# Altium PCB {TEX137}_F2837x_controlCARD_R1.3_PCB_PADS.PcbDoc (part 4 of 6)
Units mm, origin at the board's own origin, x right, y up, seen from the top; angles counter-clockwise.
Board outline 105.77 x 51.09 mm, 10 copper layers (Primary Side, Inner Layer 2, Inner Layer 3, Inner Layer 4, Inner Layer 5, Inner Layer 6, Inner Layer 7, Inner Layer 8, Inner Layer 9, Secondary Side), stack 1.634 mm thick; 292 components, 317 nets, 1400 pads, 1032 vias.
Unrouted connection lines stored in the file: 106.
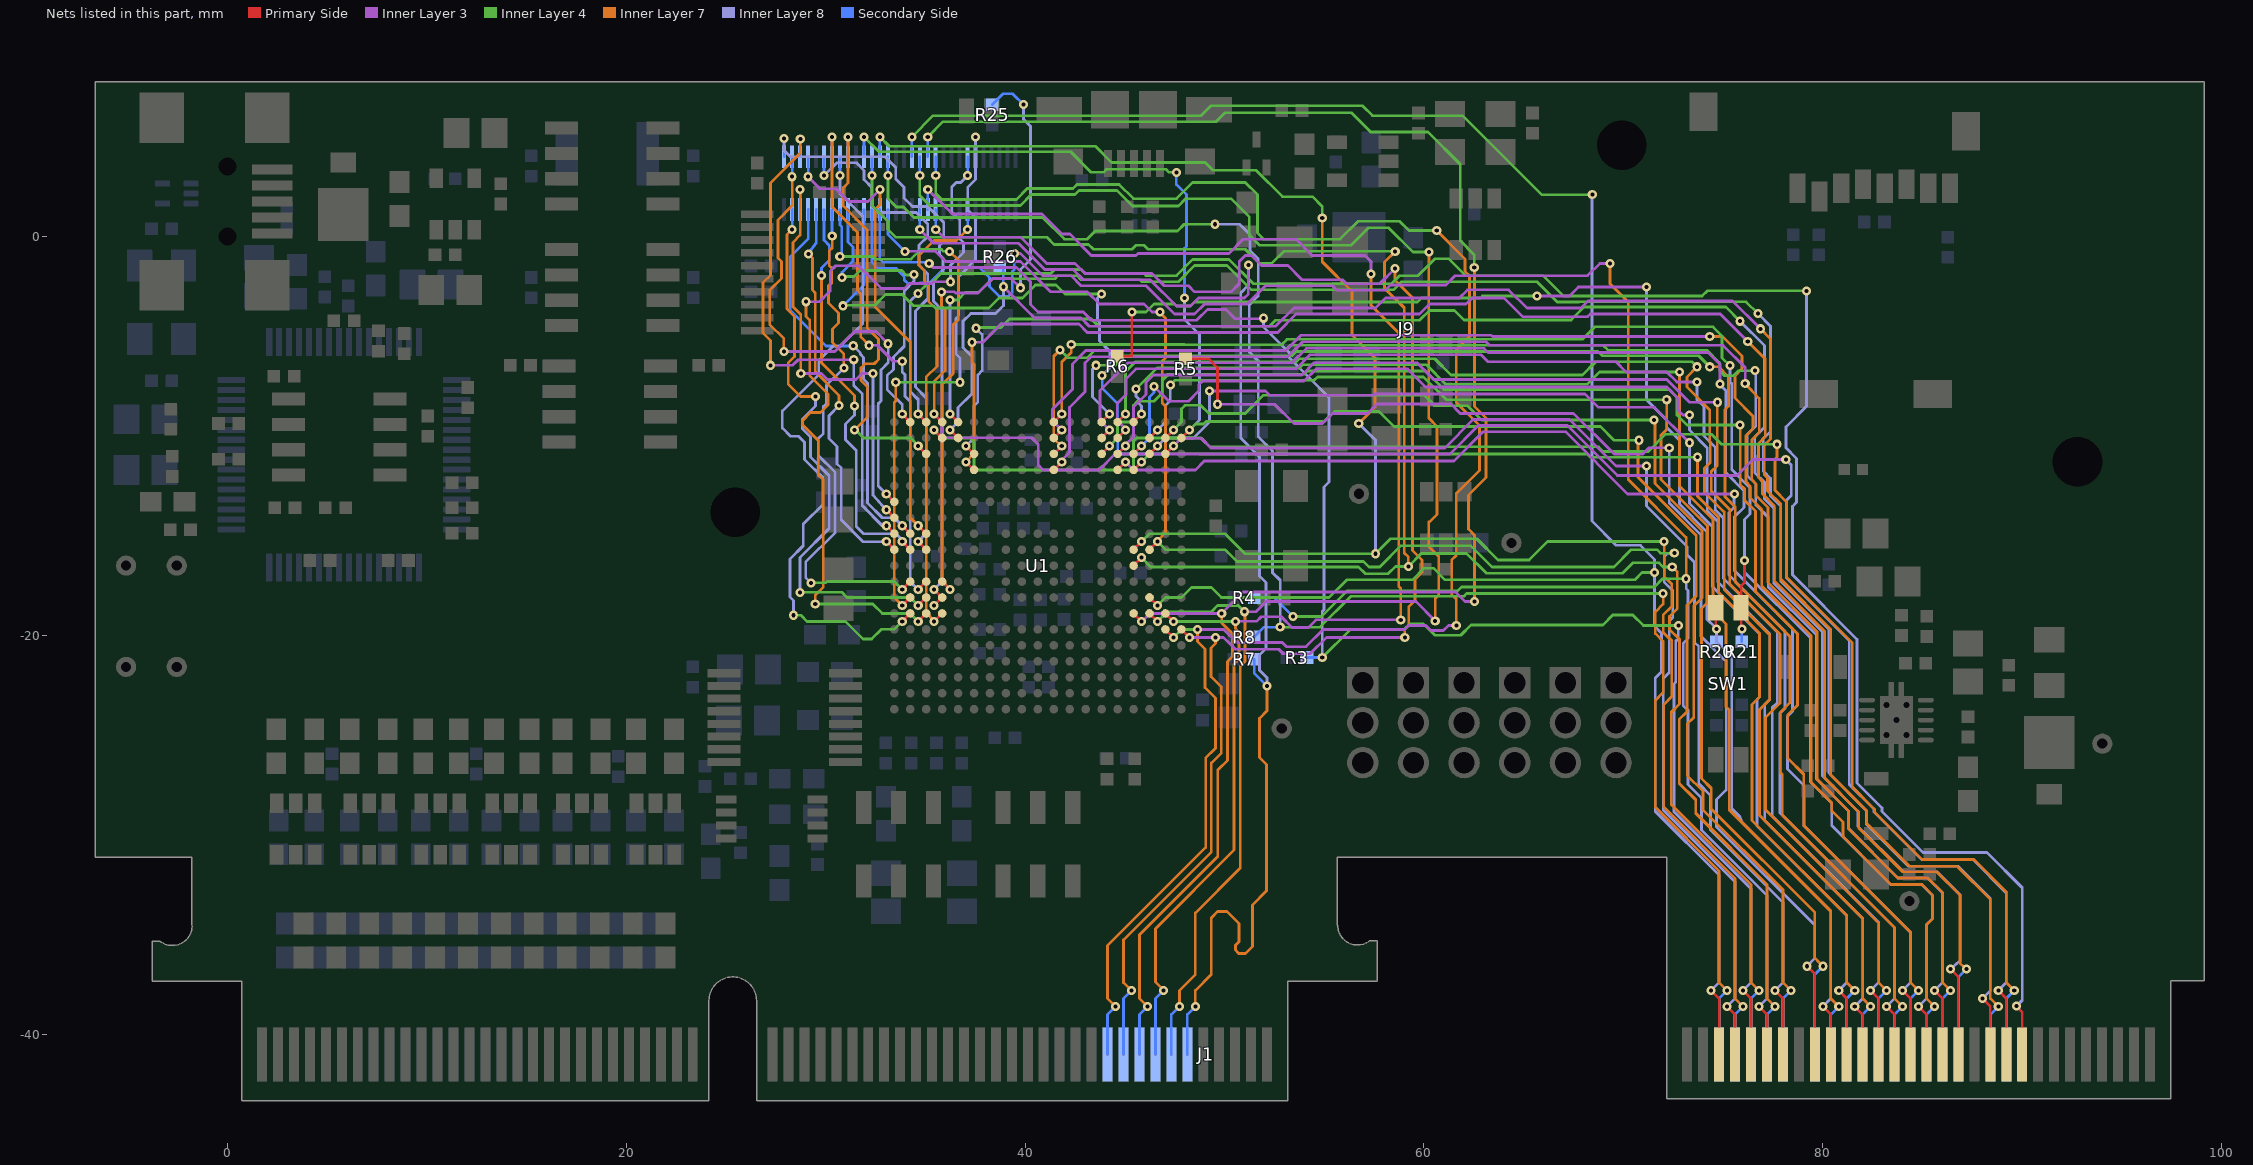
[diagram p12: the nets of this part, all layers, seen from the top]

## Via types
v1: diameter 0.457, hole 0.203, Primary Side to Secondary Side, 1025 vias
v2: diameter 0.711, hole 0.254, Primary Side to Secondary Side, 7 vias

## Nets (pads, with @x,y where several pads share a name; then routed paths per layer and width w, separated by ;. In a path a pad name is that pad's centre, name@x,y a point inside that pad or via, vN(x,y) a via of type N, cw(c..) or ccw(c..) an arc to the next point about the centre after c; other vN are vias at no path point) (continued)
MCU_GPIO-54_L: J1.100 J9.40 U1.P18 | length 93
  Primary Side w0.135: U1.P18@47.04,-19.71 v1(47.44,-20.11)
  Inner Layer 3 w0.14: v1(48.642,-19.711) 49.642,-19.71 49.962,-19.71 50.623,-20.371 52.896,-20.371 53.099,-20.575 54.09,-20.575 54.954,-19.71 59.017,-19.71 59.218,-19.51 60.109,-19.51 60.363,-19.764 60.972,-19.764 61.226,-19.51 v1(61.624,-19.51)
  Inner Layer 4 w0.14: v1(35.521,3.052) 35.521,2.152 35.821,1.852 39.561,1.852 40.109,2.399 42.406,2.399 42.609,2.603 44.718,2.603 45.429,1.891 47.588,1.891 48.401,2.704 51.042,2.704 51.652,2.095 51.652,0.164 51.957,-0.141 55.791,-0.141 56.693,0.761 58.776,0.761 59.246,0.291 v1(60.643,0.291) ; v1(47.44,-20.11) 47.84,-19.71 v1(48.642,-19.711)
  Inner Layer 7 w0.14: v1(44.537,-38.623) 44.137,-38.223 44.137,-35.569 49.055,-30.651 49.055,-26.155 49.543,-25.667 49.543,-23.15 49.023,-22.63 49.023,-20.689 48.642,-20.307 v1(48.642,-19.711) ; v1(60.643,0.291) 62.065,-1.131 62.065,-1.753 62.281,-1.968 62.281,-5.008 61.624,-5.665 61.624,-8.327 62.787,-9.49 62.787,-11.736 61.624,-12.899 61.624,-16.002 61.392,-16.234 61.392,-17.954 61.624,-18.186 v1(61.624,-19.51)
  Secondary Side w0.135: v1@35.52,3.052 J9.40@35.52,3.992 ; J1.100@44.137,-41.024 44.137,-39.023 ; 44.137,-39.023 v1(44.537,-38.623)
MCU_GPIO-55_L: J1.102 J9.39 U1.P19 | length 82.7
  Primary Side w0.135: U1.P19@47.84,-19.71 v1(48.24,-20.11)
  Inner Layer 3 w0.14: v1(35.521,0.352) 35.912,-0.039 39.765,-0.039 41.085,-1.36 42.508,-1.36 43.016,-1.868 46.369,-1.868 46.978,-2.477 48.197,-2.477 48.502,-2.782 50.331,-2.782 50.737,-2.376 50.737,-1.258 51.042,-0.953 51.347,-0.953 51.855,-1.461 53.176,-1.461 53.887,-2.173 55.919,-2.173 56.122,-2.376 57.785,-2.376 v1(58.547,-1.614) ; v1(48.24,-20.11) 49.541,-20.11 49.956,-20.111 50.547,-20.702 52.718,-20.702 52.947,-20.93 54.293,-20.93 55.112,-20.118 v1(59.042,-20.118)
  Inner Layer 7 w0.14: v1(45.337,-37.823) 44.937,-37.423 44.937,-35.277 49.34,-30.874 49.34,-26.403 49.841,-25.903 49.841,-22.593 49.326,-22.078 49.326,-20.637 49.547,-20.416 49.547,-20.116 v1(49.542,-20.111) ; v1(58.547,-1.614) 58.547,-2.2 59.423,-3.076 59.423,-15.749 59.905,-16.231 59.905,-16.842 59.551,-17.197 59.551,-18.261 59.243,-18.568 59.243,-19.484 59.042,-19.686 v1(59.042,-20.118)
  Secondary Side w0.135: v1@35.52,0.352 J9.39@35.52,1.352 ; J1.102@44.937,-41.024 44.937,-38.223 ; 44.937,-38.223 v1(45.337,-37.823)
MCU_GPIO-56_L: J1.104 J9.38 U1.N16 | length 94.9
  Primary Side w0.135: U1.N16@45.44,-18.91 v1(45.84,-19.31)
  Inner Layer 3 w0.14: v1(45.84,-19.31) 46.291,-18.91 v1(49.86,-18.91) 50.173,-18.589 50.93,-17.832 61.585,-17.832 62.064,-18.311 v1(62.544,-18.311)
  Inner Layer 4 w0.14: v1(35.12,4.992) 35.881,5.752 49.588,5.752 50.032,6.197 56.375,6.197 57.335,5.238 60.204,5.238 61.823,3.619 61.823,-0.217 62.523,-0.929 v1(62.523,-1.563)
  Inner Layer 7 w0.14: v1(46.137,-38.623) 45.737,-38.223 45.737,-35.022 49.664,-31.095 49.664,-26.765 50.153,-26.276 50.153,-21.323 50.407,-21.069 50.407,-19.926 49.86,-19.379 v1(49.86,-18.91) ; v1(62.523,-1.563) 62.544,-1.584 62.544,-8.53 63.118,-9.104 63.118,-12.097 62.239,-12.975 62.239,-14.682 62.544,-14.987 v1(62.544,-18.311)
  Secondary Side w0.135: J9.38@35.12,3.992 v1(35.12,4.992) ; J1.104@45.737,-41.024 45.737,-39.023 ; 45.737,-39.023 v1(46.137,-38.623)
MCU_GPIO-57_L: J1.106 J9.37 U1.N18 | length 80.3
  Primary Side w0.135: U1.N18@47.04,-18.91 v1(47.44,-19.31)
  Inner Layer 3 w0.14: v1(35.121,2.352) 36.356,1.117 40.844,1.117 41.847,0.113 42.254,0.113 43.321,-0.953 45.556,-0.953 45.657,-0.852 50.229,-0.852 50.941,-0.141 53.582,-0.141 54.395,-0.953 57.037,-0.953 57.34,-1.257 v1(57.34,-1.88) ; v1(50.546,-19.304) 51.614,-19.304 51.842,-19.076 52.845,-19.076 53.378,-19.609 54.205,-19.609 54.585,-19.228 v1(58.839,-19.228)
  Inner Layer 4 w0.14: v1(47.44,-19.31) 50.54,-19.31 v1(50.546,-19.304)
  Inner Layer 7 w0.14: v1(46.938,-37.823) 46.938,-37.785 46.537,-37.385 46.537,-34.718 50.483,-30.772 50.483,-21.45 50.723,-21.21 50.723,-19.849 50.546,-19.672 v1(50.546,-19.304) ; v1(57.34,-1.88) 57.34,-3.451 58.737,-4.848 58.737,-17.549 58.839,-17.654 v1(58.839,-19.228)
  Secondary Side w0.135: J9.37@35.12,1.352 v1(35.121,2.352) ; J1.106@46.537,-41.024 46.537,-38.223 ; 46.537,-38.223 v1(46.938,-37.823)
MCU_GPIO-58_L: J1.108 J9.36 U1.N17 | length 89.3
  Primary Side w0.135: U1.N17@46.24,-18.91 v1(46.64,-19.31)
  Inner Layer 3 w0.14: v1(51.003,-18.821) 51.588,-18.821 52.095,-18.314 59.601,-18.314 v1(60.566,-19.279)
  Inner Layer 4 w0.14: v1(34.721,3.052) 34.721,2.052 35.221,1.552 39.765,1.552 40.307,2.095 42.508,2.095 42.711,2.298 44.616,2.298 45.39,1.523 47.689,1.523 48.057,1.891 50.331,1.891 51.245,0.977 51.245,0.063 51.753,-0.445 56.343,-0.445 57.22,0.431 58.229,0.431 59.447,-0.787 v1(60.249,-0.787) ; v1(46.64,-19.31) 47.129,-18.821 49.34,-18.821 49.652,-18.51 50.691,-18.51 v1(51.003,-18.821)
  Inner Layer 7 w0.14: v1(47.738,-38.623) 47.738,-37.823 48.538,-37.023 48.538,-33.924 50.788,-31.673 50.788,-21.563 51.029,-21.323 51.029,-18.847 v1(51.003,-18.821) ; v1(60.249,-0.787) 60.249,-1.194 60.242,-1.201 60.242,-9.115 60.654,-9.527 60.654,-13.941 60.273,-14.322 60.242,-14.322 60.242,-15.545 60.742,-16.045 60.742,-17.987 60.566,-18.163 v1(60.566,-19.279)
  Secondary Side w0.135: v1@34.72,3.052 J9.36@34.72,3.992 ; J1.108@47.337,-41.024 47.337,-39.023 ; 47.338,-39.023 v1(47.738,-38.623)
MCU_GPIO-59_L: J1.110 J9.35 R7.1 | length 69.7
  Inner Layer 3 w0.14: v1(34.721,0.352) 35.418,-0.345 39.664,-0.345 40.984,-1.665 42.406,-1.665 42.914,-2.173 46.267,-2.173 47.588,-3.493 48.299,-3.493 48.705,-3.087 50.991,-3.087 51.194,-2.884 51.194,-1.449 v1(51.207,-1.436)
  Inner Layer 7 w0.14: v1(48.538,-38.623) 48.538,-37.823 49.338,-37.023 49.338,-34.178 49.655,-33.861 50.132,-33.861 50.728,-34.458 50.728,-35.372 50.551,-35.55 50.551,-35.791 50.716,-35.956 51.055,-35.956 51.398,-35.613 51.398,-33.527 52.109,-32.816 52.109,-26.479 51.753,-26.123 51.753,-24.168 52.133,-23.789 v1(52.133,-22.543)
  Inner Layer 8 w0.14: v1(51.207,-1.436) 51.207,-2.44 50.812,-2.834 50.812,-10.12 51.753,-11.061 51.753,-17.031 52.082,-17.36 52.082,-20.664 51.753,-20.993 51.753,-21.755 52.133,-22.135 v1(52.133,-22.543)
  Secondary Side w0.135: v1@34.72,0.352 J9.35@34.72,1.352 ; J1.110@48.137,-41.024 48.137,-39.023 ; 48.138,-39.023 v1(48.538,-38.623) ; R7.1@51.487,-21.209 51.487,-21.897 v1(52.133,-22.543)
MCU_GPIO-60_L: J1.125 J9.34 U1.M17 | length 111.8
  Primary Side w0.135: U1.M17@46.24,-18.11 v1(46.64,-18.51) ; v1(74.403,-37.823) 74.803,-38.223 J1.125@74.803,-41.024
  Inner Layer 4 w0.14: v1(34.32,4.992) 35.381,6.052 48.832,6.052 49.332,6.553 56.917,6.553 57.417,6.052 61.943,6.052 65.904,2.091 v1(68.444,2.091) ; v1(46.64,-18.51) 47.039,-18.111 47.842,-18.111 48.342,-17.611 49.342,-17.611 49.842,-18.111 55.245,-18.111 56.132,-17.224 59.424,-17.224 60.01,-16.638 60.478,-16.638 61.064,-17.224 70.571,-17.224 70.942,-16.852 v1(71.565,-16.852)
  Inner Layer 8 w0.14: v1(68.444,2.091) 68.428,2.075 68.428,-14.275 69.647,-15.494 70.854,-15.494 71.565,-16.205 v1(71.565,-16.852) 71.565,-19.545 71.921,-19.9 71.921,-21.83 71.603,-22.148 71.603,-28.83 74.803,-32.031 74.803,-37.423 v1(74.403,-37.823)
  Secondary Side w0.135: J9.34@34.32,3.992 v1(34.32,4.992)
MCU_GPIO-61_L: J1.126 J9.28 R8.1 | length 89
  Inner Layer 4 w0.14: v1(33.121,3.052) 33.121,1.892 33.54,1.473 33.9,1.473 34.421,0.952 40.882,0.952 41.974,-0.14 43.116,-0.14 43.522,0.266 47.636,0.266 47.98,0.609 v1(49.517,0.609) ; v1(52.794,-19.597) 54.789,-19.597 56.337,-18.049 62.001,-18.049 62.141,-17.91 v1(71.998,-17.91)
  Inner Layer 7 w0.14: v1(71.998,-17.91) 71.998,-18.443 71.604,-18.837 71.604,-19.913 71.998,-20.307 71.998,-22.872 71.601,-23.268 71.601,-28.622 74.803,-31.824 74.803,-37.423 v1(75.203,-37.823)
  Inner Layer 8 w0.14: v1(49.517,0.609) 50.751,0.609 51.279,0.08 51.279,-0.709 51.689,-1.118 51.689,-2.985 51.245,-3.429 51.245,-5.793 51.689,-6.237 51.689,-10.032 52.414,-10.757 52.414,-16.866 52.794,-17.247 52.794,-19.305 v1(52.794,-19.597)
  Secondary Side w0.135: v1@33.12,3.052 J9.28@33.12,3.992 ; R8.1@51.487,-20.092 51.981,-19.597 v1(52.794,-19.597) ; J1.126@74.803,-41.024 74.803,-38.223 v1(75.203,-37.823)
MCU_GPIO-62_L: J1.127 J9.27 U1.J17 | length 84.5
  Primary Side w0.14: U1.J17@46.24,-15.71 v1(46.641,-15.31) ; v1(75.203,-38.623) 75.603,-39.023 J1.127@75.603,-41.024
  Inner Layer 3 w0.14: v1(33.973,-0.75) 35.516,-0.75 36.024,-1.258 39.765,-1.258 41.289,-2.782 43.117,-2.782 43.727,-3.392 45.962,-3.392 46.369,-3.798 v1(46.775,-3.798)
  Inner Layer 4 w0.14: v1(46.641,-15.31) 47.04,-15.709 50.028,-15.709 50.618,-16.299 56.964,-16.299 57.241,-16.576 57.787,-16.576 58.854,-15.509 62.345,-15.509 63.411,-16.576 69.53,-16.576 70.397,-15.709 71.692,-15.709 71.87,-15.887 v1(72.556,-15.887)
  Inner Layer 7 w0.14: v1(46.641,-15.31) 47.04,-14.834 47.04,-8.523 46.877,-8.36 46.877,-6.26 47.04,-6.097 47.04,-4.103 46.775,-3.838 v1(46.775,-3.798)
  Inner Layer 8 w0.14: v1(72.556,-15.887) 72.226,-15.887 72.048,-16.065 72.048,-17.335 72.48,-17.767 72.48,-19.113 72.302,-19.291 72.302,-21.865 72.003,-22.164 72.003,-28.773 75.603,-32.374 75.603,-38.223 v1(75.203,-38.623)
  Secondary Side w0.14: J9.27@33.12,1.352 33.12,0.103 v1(33.973,-0.75)
MCU_GPIO-63_L: J1.128 J9.26 U1.J16 | length 100.5
  Primary Side w0.135: U1.J16@45.44,-15.71 v1(45.84,-15.31)
  Inner Layer 4 w0.14: v1(32.72,4.992) 33.191,4.52 43.524,4.52 44.337,3.708 49.034,3.708 49.428,3.314 51.588,3.314 52.91,1.991 54.408,1.991 54.902,1.498 v1(54.902,0.914) ; v1(45.84,-15.31) 46.24,-14.91 50.021,-14.91 51.026,-15.916 v1(57.569,-15.916) 58.32,-15.164 62.649,-15.164 63.716,-16.231 65.277,-16.231 66.205,-15.303 v1(72.048,-15.303)
  Inner Layer 7 w0.14: v1(54.902,0.914) 54.902,-1.271 56.388,-2.757 56.388,-4.941 57.545,-6.098 57.545,-8.573 v1(56.732,-9.386) ; v1(72.048,-15.303) 72.048,-17.056 72.429,-17.437 72.429,-18.557 71.998,-18.988 71.998,-19.85 72.429,-20.281 72.429,-23.075 72.032,-23.472 72.032,-28.622 75.603,-32.193 75.603,-38.223 v1(76.003,-38.623)
  Inner Layer 8 w0.14: v1(56.732,-9.386) 57.545,-10.199 57.569,-10.199 v1(57.569,-15.916)
  Secondary Side w0.135: J9.26@32.72,3.992 v1(32.72,4.992) ; J1.128@75.603,-41.024 75.603,-39.023 v1(76.003,-38.623)
MCU_GPIO-64_L: J1.129 J9.25 R3.2 | length 86.3
  Primary Side w0.135: v1(76.003,-37.823) 76.403,-38.223 J1.129@76.403,-41.024
  Inner Layer 3 w0.14: v1(35.193,-1.36) 35.396,-1.563 39.561,-1.563 40.273,-2.274 40.273,-3.417 40.654,-3.798 42.914,-3.798 43.321,-4.205 48.604,-4.205 49.144,-3.665 50.071,-3.665 50.534,-4.128 51.957,-4.128 v1(51.957,-4.103)
  Inner Layer 4 w0.14: v1(54.903,-21.121) 56.313,-19.711 59.016,-19.711 59.296,-19.432 59.982,-19.432 60.553,-20.003 61.848,-20.003 62.37,-19.482 68.974,-19.482 69.469,-18.986 70.471,-18.986 71.004,-19.519 v1(72.759,-19.519)
  Inner Layer 8 w0.14: v1(51.957,-4.103) 51.957,-4.544 53.242,-5.83 53.242,-6.074 55.243,-8.074 55.243,-12.319 54.993,-12.569 54.993,-18.721 54.903,-18.811 v1(54.903,-21.121) ; v1(72.759,-19.519) 72.759,-20.17 72.628,-20.302 72.628,-22.353 72.54,-22.441 72.54,-28.853 76.403,-32.716 76.403,-37.423 v1(76.003,-37.823)
  Secondary Side w0.135: J9.25@32.72,1.352 32.72,-1.13 32.884,-1.293 35.126,-1.293 v1(35.193,-1.36) ; R3.2@54.141,-21.121 v1(54.903,-21.121)
MCU_GPIO-65_L: J1.130 J9.24 U1.K16 | length 102.8
  Primary Side w0.135: U1.K16@45.44,-16.51 v1(45.84,-16.11)
  Inner Layer 4 w0.14: v1(32.321,3.052) 32.321,1.552 33.12,0.752 33.12,0.352 33.511,-0.039 41.085,-0.039 41.453,-0.407 43.181,-0.407 43.422,-0.648 45.353,-0.648 45.556,-0.445 45.962,-0.445 46.165,-0.648 51.042,-0.648 51.754,-1.36 52.363,-1.36 52.972,-0.75 v1(58.56,-0.75) ; v1(45.84,-16.11) 46.303,-16.573 56.723,-16.573 57.067,-16.916 58.204,-16.916 58.571,-16.549 v1@59.22,-16.549 ; v1(59.22,-16.562) v1@59.22,-16.549 ; v1(72.454,-16.573) 71.997,-16.573 71.794,-16.37 70.473,-16.37 69.952,-16.891 63.132,-16.891 62.142,-15.901 59.867,-15.901 v1@59.22,-16.549
  Inner Layer 7 w0.14: v1(58.56,-0.75) 58.027,-1.284 58.027,-2.604 59.016,-3.582 59.016,-15.876 59.22,-16.079 v1(59.22,-16.562) ; v1(72.454,-16.573) 72.708,-16.827 72.708,-18.656 72.312,-19.053 72.312,-19.706 72.81,-20.205 72.81,-23.456 72.401,-23.865 72.401,-28.497 76.403,-32.499 76.403,-37.423 v1(76.804,-37.823)
  Secondary Side w0.135: v1@32.32,3.052 J9.24@32.32,3.992 ; J1.130@76.403,-41.024 76.403,-38.223 v1(76.804,-37.823)
MCU_GPIO-66_L: J1.131 J9.23 R4.2 | length 112.2
  Primary Side w0.135: v1(76.803,-38.623) 77.203,-39.023 J1.131@77.203,-41.024
  Inner Layer 3 w0.14: v1(39.46,-0.852) 39.765,-0.852 40.882,-1.969 42.305,-1.969 42.813,-2.477 46.064,-2.477 47.486,-3.9 48.502,-3.9 49.01,-3.392 51.144,-3.392 52.058,-2.477 55.411,-2.477 55.64,-2.707 58.05,-2.707 58.324,-2.433 61.106,-2.433 61.57,-1.969 68.213,-1.969 68.822,-1.36 v1(69.33,-1.36)
  Inner Layer 4 w0.14: v1(53.43,-19.064) 54.865,-19.064 56.147,-17.782 61.69,-17.782 61.887,-17.584 71.557,-17.584 71.972,-17.17 v1(73.152,-17.17)
  Inner Layer 7 w0.14: v1(69.33,-1.36) 69.33,-2.376 70.245,-3.29 70.245,-12.194 73.152,-15.101 v1(73.152,-17.17)
  Inner Layer 8 w0.14: v1(73.152,-17.17) 73.152,-17.665 73.242,-17.755 73.242,-20.17 73.001,-20.411 73.001,-23.523 73.242,-23.764 73.242,-27.485 73.916,-28.159 73.916,-29.771 77.204,-33.059 77.204,-38.223 v1(76.803,-38.623)
  Secondary Side w0.135: J9.23@32.32,1.352 32.32,-1.308 32.62,-1.608 33.54,-1.608 33.94,-2.008 33.94,-2.185 34.118,-2.363 34.722,-2.363 34.747,-2.337 35.204,-2.337 35.992,-1.55 37.705,-1.55 38.213,-2.058 38.213,-2.515 38.709,-3.011 39.155,-3.011 39.358,-2.808 39.358,-1.752 39.46,-1.65 v1(39.46,-0.852) ; R4.2@51.487,-18.111 52.477,-18.111 v1(53.43,-19.064)
MCU_GPIO-67_L: J1.132 J9.22 U1.B19 | length 89.9
  Primary Side w0.135: U1.B19@47.84,-10.11 v1(48.24,-9.71)
  Inner Layer 4 w0.14: v1(31.92,4.992) 32.671,4.241 42.292,4.241 43.321,3.212 43.93,3.212 44.083,3.365 47.066,3.365 47.219,3.212 v1(47.588,3.212) ; v1(48.24,-9.71) 48.541,-9.409 48.941,-9.409 49.066,-9.285 55.005,-9.285 55.513,-8.777 57.748,-8.777 58.499,-9.528 68.846,-9.528 69.54,-10.223 v1(70.778,-10.223)
  Inner Layer 7 w0.14: v1(70.778,-10.223) 70.74,-10.223 70.74,-12.079 73.659,-14.999 73.659,-18.035 73.191,-18.503 73.191,-23.837 72.801,-24.227 72.801,-27.422 73.631,-28.251 73.631,-28.926 77.204,-32.499 77.204,-38.223 v1(77.604,-38.623)
  Inner Layer 8 w0.14: v1(47.994,-3.087) 47.994,-4.169 48.741,-4.916 48.741,-9.209 v1(48.24,-9.71)
  Secondary Side w0.135: J9.22@31.92,3.992 v1(31.92,4.992) ; v1(47.588,3.212) 47.588,2.603 48.096,2.095 48.096,-0.499 47.994,-0.601 v1(47.994,-3.087) ; J1.132@77.204,-41.024 77.204,-39.023 v1(77.604,-38.623)
MCU_GPIO-68_L: J1.133 J9.21 U1.C18 | length 90
  Primary Side w0.135: U1.C18@47.04,-10.91 v1(47.44,-10.51) ; v1(77.603,-37.823) 78.003,-38.223 J1.133@78.003,-41.024
  Inner Layer 3 w0.14: v1(47.44,-10.51) 47.828,-10.122 48.832,-10.122 49.315,-10.605 61.048,-10.605 62.47,-9.183 67.298,-9.183 69.635,-11.52 v1(71.159,-11.52)
  Inner Layer 4 w0.14: v1(30.873,-3.481) 30.899,-3.455 32.46,-3.455 33.007,-2.909 33.839,-2.909 34.411,-3.481 35.396,-3.481 35.51,-3.595 38.189,-3.595 38.697,-3.087 39.866,-3.087 40.514,-2.439 41.555,-2.439 42,-2.884 v1(43.829,-2.884)
  Inner Layer 8 w0.14: v1(43.829,-2.884) 43.625,-3.087 43.625,-4.205 43.727,-4.306 43.727,-5.241 44.246,-5.76 44.246,-6.591 v1(43.865,-6.972) ; v1(71.159,-11.52) 71.159,-13.525 73.191,-15.557 73.191,-15.963 73.572,-16.344 73.572,-20.359 73.787,-20.574 73.787,-27.446 74.373,-28.032 74.373,-29.771 78.004,-33.402 78.004,-37.423 v1(77.603,-37.823)
  Secondary Side w0.135: v1(30.873,-3.481) 31.92,-2.434 J9.21@31.92,1.352 ; v1(43.865,-6.972) 43.865,-7.607 44.64,-8.382 44.64,-10.795 44.754,-10.909 47.041,-10.909 v1(47.44,-10.51)
MCU_GPIO-69_L: J1.134 U1.B18 | length 62.1
  Primary Side w0.135: U1.B18@47.04,-10.11 v1(47.44,-9.71)
  Inner Layer 4 w0.14: v1(47.44,-9.71) 47.841,-9.309 47.841,-8.649 48.018,-8.472 48.807,-8.472 49.213,-8.878 51.042,-8.878 51.957,-7.964 60.008,-7.964 60.541,-8.496 62.18,-8.496 62.89,-9.207 v1(71.54,-9.207)
  Inner Layer 7 w0.14: v1(71.54,-9.207) 71.591,-9.207 71.591,-12.397 73.939,-14.745 73.939,-18.136 73.533,-18.542 73.533,-24.13 73.201,-24.462 73.201,-27.028 73.995,-27.822 73.995,-28.756 78.004,-32.765 78.004,-37.423 v1(78.404,-37.823)
  Secondary Side w0.135: J1.134@78.004,-41.024 78.004,-38.223 v1(78.404,-37.823)
MCU_GPIO-70_L: J1.137 R5.2 | length 62.4
  Primary Side w0.135: R5.2@48.045,-6.135 49.188,-6.135 49.645,-6.592 v1(49.645,-8.42) ; v1(79.204,-36.601) 79.603,-37.001 J1.137@79.603,-41.024
  Inner Layer 3 w0.14: v1(49.645,-8.42) 52.514,-8.42 53.481,-9.386 54.903,-9.386 55.411,-8.878 57.175,-8.878 57.646,-8.407 61.353,-8.407 61.824,-8.878 67.501,-8.878 69.548,-10.925 70.956,-10.925 71.277,-10.604 v1(72.302,-10.604)
  Inner Layer 8 w0.14: v1(72.302,-10.604) 72.302,-13.375 73.901,-14.974 73.901,-20.053 75.158,-21.31 75.158,-27.767 74.678,-28.247 74.678,-29.619 79.604,-34.545 79.604,-36.182 v1(79.204,-36.601)
MCU_GPIO-71_L: J1.138 U1.B17 | length 65.3
  Primary Side w0.135: U1.B17@46.24,-10.11 v1(46.64,-9.71)
  Inner Layer 4 w0.14: v1(47.283,-7.456) 47.523,-7.216 54.497,-7.216 54.663,-7.049 59.984,-7.049 61.126,-8.191 v1(72.175,-8.191)
  Inner Layer 7 w0.14: v1(72.175,-8.191) 72.175,-9.69 71.896,-9.969 71.896,-12.194 74.218,-14.516 74.218,-18.365 73.914,-18.669 73.914,-27.178 74.41,-27.674 74.41,-28.714 79.604,-33.908 79.604,-36.182 v1(80.004,-36.601)
  Inner Layer 8 w0.14: v1(46.64,-9.71) 47.04,-9.31 47.04,-8.472 47.283,-8.229 v1(47.283,-7.456)
  Secondary Side w0.135: J1.138@79.604,-41.024 79.604,-37.001 v1(80.004,-36.601)
MCU_GPIO-72_L: J1.139 R6.2 R20.2 SW1.2 | length 73.7
  Primary Side w0.135: R6.2@44.616,-6.008 45.353,-6.008 v1(45.353,-3.798) ; SW1.2@74.637,-18.63 74.637,-19.646 v1(74.676,-19.685) ; v1(80.004,-38.623) 80.403,-39.022 J1.139@80.403,-41.024
  Inner Layer 3 w0.14: v1(65.673,-2.985) 67.297,-2.985 67.743,-2.54 v1(71.159,-2.54)
  Inner Layer 4 w0.14: v1(45.353,-3.798) 46.064,-3.798 46.47,-3.392 47.486,-3.392 47.588,-3.493 48.299,-3.493 48.502,-3.29 59.678,-3.29 59.881,-3.087 62.828,-3.087 62.929,-2.985 v1(65.673,-2.985)
  Inner Layer 8 w0.14: v1(71.159,-2.54) 71.159,-8.191 72.175,-9.207 72.175,-9.588 72.81,-10.223 72.81,-13.426 74.18,-14.796 74.18,-19.177 74.65,-19.647 v1(74.676,-19.685) 74.676,-20.32 75.438,-21.082 75.438,-28.702 75.838,-29.083 75.927,-29.356 80.404,-33.833 80.404,-38.223 v1(80.004,-38.623)
  Secondary Side w0.135: R20.2@74.676,-20.32 v1(74.676,-19.685)
MCU_GPIO-73_L: J1.140 U1.A16 | length 68.1
  Primary Side w0.135: U1.A16@45.44,-9.31 v1(45.84,-8.91)
  Inner Layer 4 w0.14: v1(45.556,-7.659) 46.608,-6.607 53.753,-6.607 53.919,-6.44 60.137,-6.44 61.116,-7.419 68.175,-7.419 68.801,-6.794 v1(72.81,-6.794)
  Inner Layer 7 w0.14: v1(72.81,-6.794) 72.81,-12.519 74.498,-14.207 74.498,-18.784 75.145,-19.431 75.145,-23.583 75.313,-23.751 75.313,-28.755 80.404,-33.845 80.404,-38.223 v1(80.804,-38.623)
  Inner Layer 8 w0.14: v1(45.556,-7.659) 45.556,-8.016 45.707,-8.167 45.707,-8.383 45.84,-8.516 v1(45.84,-8.91)
  Secondary Side w0.135: J1.140@80.404,-41.024 80.404,-39.023 v1(80.804,-38.623)
MCU_GPIO-74_L: J1.141 U1.C17 | length 64.8
  Primary Side w0.135: U1.C17@46.24,-10.91 v1(46.64,-10.51) ; v1(80.804,-37.823) 81.203,-38.222 J1.141@81.203,-41.024
  Inner Layer 3 w0.14: v1(49.242,-7.761) 52.058,-7.761 52.261,-7.964 57.479,-7.964 57.545,-7.898 68.072,-7.898 68.746,-8.572 71.54,-8.572 v1(73.318,-10.35)
  Inner Layer 8 w0.14: v1(46.64,-10.51) 47.041,-10.109 48.44,-10.109 49.242,-9.307 v1(49.242,-7.761) ; v1(73.318,-10.35) 73.318,-13.398 74.459,-14.539 74.459,-17.552 76.835,-19.928 76.835,-23.102 76.708,-23.229 76.708,-29.565 81.204,-34.061 81.204,-37.423 v1(80.804,-37.823)
MCU_GPIO-75_L: J1.142 U1.D16 | length 62.4
  Primary Side w0.135: U1.D16@45.44,-11.71 v1(45.84,-11.31)
  Inner Layer 4 w0.127: 46.249,-10.909 48.756,-10.909
  Inner Layer 4 w0.14: v1(45.84,-11.31) 46.241,-10.909 46.249,-10.909 ; 48.756,-10.909 68.187,-10.909 68.352,-11.074 v1(73.724,-11.074)
  Inner Layer 7 w0.14: v1(73.724,-11.074) 73.724,-13.03 74.777,-14.082 74.777,-17.844 76.835,-19.902 76.835,-23.102 76.454,-23.483 76.454,-29.298 81.204,-34.048 81.204,-37.423 v1(81.604,-37.823)
  Secondary Side w0.135: J1.142@81.204,-41.024 81.204,-38.223 v1(81.604,-37.823)
MCU_GPIO-76_L: J1.143 U1.C16 | length 69.3
  Primary Side w0.135: U1.C16@45.44,-10.91 v1(45.84,-10.51) ; v1(81.604,-38.623) 82.003,-39.022 J1.143@82.003,-41.024
  Inner Layer 3 w0.14: v1(46.469,-7.519) 47.218,-8.269 48.197,-8.269 48.705,-7.761 48.705,-7.456 48.909,-7.253 53.989,-7.253 54.598,-6.643 59.172,-6.643 60.085,-7.556 72.175,-7.556 72.747,-8.128 72.747,-8.699 73.001,-8.953 v1(73.318,-8.953)
  Inner Layer 8 w0.14: v1(73.318,-8.953) 73.318,-9.715 74.207,-10.604 74.207,-13.779 74.739,-14.311 74.739,-17.336 77.343,-19.94 77.343,-23.229 77.089,-23.483 77.089,-29.299 82.004,-34.214 82.004,-38.223 v1(81.604,-38.623)
  Secondary Side w0.135: v1(45.84,-10.51) 46.241,-10.109 46.241,-8.053 46.469,-7.824 v1(46.469,-7.519)
MCU_GPIO-77_L: J1.144 U1.A15 | length 71.7
  Primary Side w0.135: U1.A15@44.64,-9.31 v1(45.04,-8.91)
  Inner Layer 4 w0.14: v1(45.04,-8.91) 45.04,-6.789 45.543,-6.286 53.582,-6.286 53.733,-6.135 60.542,-6.135 61.353,-6.946 67.957,-6.946 68.618,-6.286 73.445,-6.286 v1(73.699,-6.54)
  Inner Layer 7 w0.14: v1(73.699,-6.54) 73.191,-7.048 73.191,-7.556 74.334,-8.699 74.334,-10.299 74.359,-10.325 74.359,-11.331 74.068,-11.622 74.068,-12.835 75.056,-13.823 75.056,-17.703 77.343,-19.99 77.343,-23.229 76.835,-23.737 76.835,-29.031 82.004,-34.201 82.004,-38.223 v1(82.404,-38.623)
  Secondary Side w0.135: J1.144@82.004,-41.024 82.004,-39.023 v1(82.404,-38.623)
MCU_GPIO-78_L: J1.145 U1.B15 | length 71.2
  Primary Side w0.135: U1.B15@44.64,-10.11 v1(45.04,-9.71) ; v1(82.404,-37.823) 82.803,-38.222 J1.145@82.803,-41.024
  Inner Layer 3 w0.14: v1(45.04,-9.71) 45.04,-9.647 44.627,-9.234 44.627,-8.37 45.059,-7.938 45.059,-7.151 45.567,-6.643 53.582,-6.643 54.29,-5.935 62.857,-5.935 63.207,-6.286 69.635,-6.286 70.143,-6.794 72.175,-6.794 72.683,-7.302 v1(73.699,-7.302)
  Inner Layer 8 w0.14: v1(73.699,-7.302) 73.699,-8.191 74.042,-8.534 74.042,-10.007 74.613,-10.579 74.613,-13.728 75.018,-14.133 75.018,-17.158 77.724,-19.864 77.724,-23.382 77.47,-23.636 77.47,-29.057 82.804,-34.392 82.804,-37.423 v1(82.404,-37.823)
MCU_GPIO-79_L: J1.146 U1.C15 | length 71.3
  Primary Side w0.135: U1.C15@44.64,-10.91 v1(45.04,-10.51)
  Inner Layer 3 w0.14: v1(45.04,-10.51) 45.04,-10.452 45.44,-10.052 45.44,-8.56 46.064,-7.936 46.064,-7.327 46.443,-6.948 53.887,-6.948 54.497,-6.338 59.654,-6.338 60.491,-7.175 72.175,-7.175 73.318,-8.318 v1(74.715,-8.318)
  Inner Layer 7 w0.14: v1(74.715,-8.318) 74.715,-11.483 74.41,-11.788 74.41,-12.773 75.336,-13.699 75.336,-17.438 77.851,-19.953 77.851,-23.407 77.128,-24.13 77.128,-28.753 82.804,-34.429 82.804,-37.423 v1(83.204,-37.823)
  Secondary Side w0.135: J1.146@82.804,-41.024 82.804,-38.223 v1(83.204,-37.823)
MCU_GPIO-80_L: J1.147 U1.D15 | length 65.6
  Primary Side w0.135: U1.D15@44.64,-11.71 v1(45.04,-11.31) ; v1(83.204,-38.623) 83.604,-39.023 83.604,-41.022 J1.147@83.603,-41.024
  Inner Layer 3 w0.14: v1(45.04,-11.31) 45.44,-11.71 48.54,-11.71 48.984,-11.266 61.505,-11.266 62.978,-9.793 67.095,-9.793 70.218,-12.915 v1(75.566,-12.915)
  Inner Layer 8 w0.14: v1(75.566,-12.915) 75.553,-12.915 75.553,-13.589 75.298,-13.845 75.298,-16.98 78.105,-19.788 78.105,-23.661 77.851,-23.915 77.851,-28.904 83.604,-34.657 83.604,-38.223 v1(83.204,-38.623)
MCU_GPIO-81_L: J1.148 U1.A14 | length 74.3
  Primary Side w0.135: U1.A14@43.84,-9.31 v1(44.24,-8.91)
  Inner Layer 4 w0.14: v1(43.561,-6.465) 44.518,-6.465 44.996,-5.987 53.379,-5.987 53.599,-5.767 68.728,-5.767 68.948,-5.987 73.781,-5.987 v1(74.334,-6.54)
  Inner Layer 7 w0.14: v1(74.334,-6.54) 74.774,-6.54 75.28,-7.046 75.28,-8.515 75.096,-8.699 75.096,-13.055 75.615,-13.574 75.615,-17.335 78.359,-20.079 78.359,-23.383 77.866,-23.876 77.866,-26.887 77.972,-26.993 77.972,-29.025 78.728,-29.782 83.604,-34.658 83.604,-38.223 v1(84.004,-38.623)
  Inner Layer 8 w0.14: v1(43.561,-6.465) 43.376,-6.65 43.376,-8.046 v1(44.24,-8.91)
  Secondary Side w0.135: J1.148@83.604,-41.024 83.604,-39.023 v1(84.004,-38.623)
MCU_GPIO-82_L: J1.149 U1.B14 | length 74.6
  Primary Side w0.135: U1.B14@43.84,-10.11 v1(44.24,-9.71) ; v1(84.004,-37.823) 84.403,-38.222 J1.149@84.403,-41.024
  Inner Layer 3 w0.14: v1(44.24,-9.71) 43.756,-9.226 43.756,-7.732 45.149,-6.338 53.379,-6.338 54.103,-5.614 63.018,-5.614 63.228,-5.824 74.252,-5.824 74.843,-6.413 v1(74.843,-7.394)
  Inner Layer 8 w0.14: v1(74.843,-7.394) 74.817,-7.42 74.817,-7.404 75.135,-7.722 75.135,-11.85 76.049,-12.765 76.049,-13.589 75.577,-14.061 75.577,-16.765 78.486,-19.674 78.486,-23.813 78.232,-24.067 78.232,-26.703 79.061,-27.532 79.061,-29.555 84.404,-34.898 84.404,-37.423 v1(84.004,-37.823)
MCU_GPIO-83_L: J1.150 U1.C14 | length 72.4
  Primary Side w0.135: U1.C14@43.84,-10.91 v1(44.24,-10.51)
  Inner Layer 4 w0.14: v1(44.24,-10.51) 44.641,-10.109 44.641,-9.409 44.741,-9.309 45.241,-9.309 45.441,-9.109 45.441,-8.472 45.644,-8.269 46.47,-8.269 46.877,-7.862 46.877,-7.216 47.181,-6.911 53.989,-6.911 54.155,-6.745 60.061,-6.745 60.999,-7.683 72.302,-7.683 72.683,-8.064 72.683,-8.953 73.191,-9.461 v1(75.858,-9.461)
  Inner Layer 7 w0.14: v1(75.858,-9.461) 75.858,-12.45 76.087,-12.68 76.087,-13.239 76.627,-13.778 76.627,-17.816 78.74,-19.929 78.74,-23.51 78.241,-24.009 78.241,-26.162 79.049,-26.97 79.049,-29.543 84.404,-34.898 84.404,-37.423 v1(84.805,-37.823)
  Secondary Side w0.135: J1.150@84.404,-41.024 84.404,-38.223 v1(84.805,-37.823)
MCU_GPIO-84: J1.151 R21.2 SW1.1 U1.A11 | length 83.6
  Primary Side w0.135: U1.A11@41.44,-9.31 v1(41.84,-8.91) ; v1(75.946,-19.685) 75.907,-19.646 SW1.1@75.907,-18.63 75.907,-17.526 76.073,-17.36 v1(76.073,-16.256) ; v1(84.805,-38.623) 85.205,-39.023 85.205,-41.022 J1.151@85.203,-41.024
  Inner Layer 4 w0.14: v1(42.316,-5.424) 43.825,-5.424 43.829,-5.427 47.984,-5.427 52.871,-5.43 53.137,-5.164 67.939,-5.164 68.566,-4.537 74.495,-4.537 74.952,-4.994 74.952,-6.099 v1(75.35,-6.48)
  Inner Layer 7 w0.14: v1(41.84,-8.91) 41.84,-6.295 42.316,-5.819 v1(42.316,-5.424)
  Inner Layer 8 w0.14: v1(75.35,-6.48) 75.35,-7.302 75.44,-7.392 75.44,-11.696 76.354,-12.61 76.354,-13.922 76.073,-14.203 v1(76.073,-16.256) 76.073,-16.841 79.381,-20.15 79.381,-27.354 80.455,-28.428 80.455,-29.552 83.402,-32.499 84.962,-32.499 85.486,-33.023 85.486,-34.223 85.205,-34.504 85.205,-38.223 v1(84.805,-38.623)
  Secondary Side w0.135: R21.2@75.946,-20.32 v1(75.946,-19.685)
MCU_GPIO-85_L: J1.152 U1.B11 | length 80
  Primary Side w0.135: U1.B11@41.44,-10.11 v1(41.84,-9.71)
  Inner Layer 3 w0.14: v1(41.84,-9.71) 41.361,-9.231 41.361,-8.681 42.377,-7.665 42.377,-6.395 43.043,-5.729 53.074,-5.729 53.849,-4.954 63.374,-4.954 63.436,-5.016 v1(74.334,-5.016)
  Inner Layer 7 w0.14: v1(74.334,-5.016) 74.969,-5.016 75.953,-6 75.953,-6.63 75.596,-6.986 75.596,-8.108 76.506,-9.018 76.506,-9.637 76.147,-9.996 76.147,-12.305 76.357,-12.515 76.357,-13.104 76.943,-13.69 76.943,-17.546 79.427,-20.031 79.427,-27.399 80.455,-28.428 80.455,-28.816 81.014,-29.375 81.014,-30.086 83.427,-32.499 84.976,-32.499 85.5,-33.023 85.5,-34.223 85.205,-34.518 85.205,-38.223 v1(85.605,-38.623)
  Secondary Side w0.135: J1.152@85.205,-41.024 85.205,-39.023 v1(85.605,-38.623)
MCU_GPIO-86_L: J1.153 U1.C11 | length 81.7
  Primary Side w0.135: U1.C11@41.44,-10.91 v1(41.84,-10.51) ; v1(85.605,-37.823) 86.003,-38.222 J1.153@86.003,-41.024
  Inner Layer 4 w0.14: v1(41.758,-5.703) 42.143,-6.088 43.121,-6.088 43.502,-5.707 53.074,-5.707 53.32,-5.462 68.982,-5.462 69.227,-5.707 74.185,-5.707 74.83,-6.353 74.83,-6.734 75.084,-6.988 75.528,-6.988 75.782,-6.734 v1(76.611,-6.734)
  Inner Layer 7 w0.14: v1(41.758,-5.703) 41.724,-5.73 41.44,-6.014 41.44,-10.187 v1(41.84,-10.51)
  Inner Layer 8 w0.14: v1(76.611,-6.734) 76.645,-6.767 76.645,-9.498 76.213,-9.93 76.213,-12.012 76.233,-12.012 76.645,-12.423 76.645,-13.464 77.268,-14.088 77.268,-17.579 79.686,-19.997 79.686,-27.201 81.294,-28.809 81.294,-29.681 83.781,-32.169 85.254,-32.169 86.003,-32.917 86.003,-37.425 v1(85.605,-37.823)
MCU_GPIO-87_L: J1.154 U1.D11 | length 80.1
  Primary Side w0.135: U1.D11@41.44,-11.71 v1(41.84,-11.31)
  Inner Layer 3 w0.14: v1(41.84,-11.31) 41.851,-11.221 42.232,-10.84 42.232,-8.572 43.012,-7.792 43.012,-6.342 43.321,-6.033 53.176,-6.033 53.925,-5.284 63.12,-5.284 63.299,-5.464 74.998,-5.464 76.112,-6.578 v1(76.112,-7.369)
  Inner Layer 7 w0.14: v1(76.112,-7.369) 76.811,-8.131 76.811,-9.84 76.439,-10.212 76.439,-12.192 76.659,-12.412 76.659,-13.002 77.248,-13.591 77.248,-17.361 79.722,-19.835 79.722,-27.237 81.294,-28.809 81.294,-29.705 83.757,-32.169 85.268,-32.169 86.005,-32.905 86.005,-37.423 v1(86.405,-37.823)
  Secondary Side w0.135: J1.154@86.005,-41.024 86.005,-38.223 v1(86.405,-37.823)
MCU_GPIO-88: J1.155 U1.C6 | length 89.8
  Primary Side w0.135: v1(37.04,-10.51) U1.C6@37.44,-10.91 ; v1(86.403,-36.741) 86.803,-37.141 J1.155@86.803,-41.024
  Inner Layer 4 w0.14: v1(37.54,-4.608) 37.582,-4.567 38.793,-4.567 39.223,-4.137 43.321,-4.137 43.693,-4.509 52.261,-4.509 52.566,-4.205 59.78,-4.205 60.273,-3.711 61.536,-3.711 62.015,-4.191 67.384,-4.191 68.032,-3.543 75.147,-3.543 v1(75.858,-4.254)
  Inner Layer 8 w0.14: v1(37.04,-10.51) 37.44,-10.122 37.44,-8.497 37.63,-8.307 37.63,-6.948 37.847,-6.732 37.847,-4.915 v1(37.54,-4.608) ; v1(75.858,-4.254) 77.077,-5.473 77.077,-9.574 76.593,-10.058 76.607,-11.857 77.077,-12.327 77.077,-13.16 77.553,-13.635 77.553,-17.406 79.991,-19.845 79.991,-27.049 81.751,-28.809 81.751,-29.567 84.048,-31.864 85.724,-31.864 86.893,-33.032 86.893,-36.322 v1(86.403,-36.741)
MCU_GPIO-89: J1.156 U1.D6 | length 89.7
  Primary Side w0.135: v1(37.04,-11.31) U1.D6@37.44,-11.71
  Inner Layer 3 w0.14: v1(37.34,-5.309) 37.884,-5.309 38.798,-4.395 42.698,-4.395 43.117,-4.814 52.668,-4.814 53.582,-3.9 59.78,-3.9 60.288,-3.392 62.117,-3.392 62.421,-3.087 64.013,-3.087 64.953,-4.027 68.211,-4.027 68.345,-3.893 74.862,-3.893 v1(76.239,-5.27)
  Inner Layer 7 w0.14: v1(37.04,-11.31) 37.44,-10.897 37.44,-6.409 37.34,-6.309 v1(37.34,-5.309) ; v1(76.239,-5.27) 77.116,-6.147 77.116,-10.043 76.777,-10.382 76.777,-12.09 76.964,-12.277 76.964,-12.903 77.573,-13.513 77.573,-17.282 80.093,-19.802 80.093,-27.151 81.802,-28.859 81.802,-29.654 84.011,-31.864 85.713,-31.864 86.88,-33.032 86.88,-36.462 v1(87.203,-36.741)
  Secondary Side w0.135: J1.156@86.805,-41.024 86.805,-37.139 v1(87.203,-36.741)
MCU_GPIO-90: J1.159 U1.A5 | length 93.2
  Primary Side w0.135: v1(36.24,-8.91) U1.A5@36.64,-9.31 ; v1(88.003,-38.223) 88.403,-38.623 J1.159@88.403,-41.024
  Inner Layer 4 w0.14: v1(36.234,-3.189) 36.627,-3.189 36.995,-2.82 37.668,-2.82 38.36,-2.128 41.492,-2.128 41.65,-1.969 42.609,-1.969 42.813,-2.173 45.759,-2.173 45.861,-2.274 47.689,-2.274 48.502,-1.461 50.128,-1.461 51.347,-2.681 58.471,-2.681 58.877,-2.274 65.673,-2.274 66.689,-3.29 67.767,-3.29 67.775,-3.282 76.156,-3.282 v1(76.747,-3.873)
  Inner Layer 8 w0.14: v1(36.234,-3.189) 36.24,-3.195 v1(36.24,-8.91) ; v1(76.747,-3.873) 77.382,-4.508 77.382,-9.777 77.018,-10.141 77.018,-11.77 77.382,-12.134 77.382,-13.007 77.892,-13.517 77.892,-17.289 80.316,-19.713 80.316,-26.917 82.183,-28.783 82.183,-29.476 84.291,-31.584 86.791,-31.584 88.403,-33.197 88.403,-37.823 v1(88.003,-38.223)
MCU_GPIO-91: J1.160 R26.2 U1.B5 | length 94.9
  Primary Side w0.135: v1(36.24,-9.71) U1.B5@36.64,-10.11
  Inner Layer 3 w0.14: v1(38.912,-2.527) 40.476,-4.09 42.8,-4.09 43.219,-4.509 52.566,-4.509 53.481,-3.595 57.568,-3.595 58.077,-3.086 61.774,-3.086 62.179,-2.681 64.25,-2.681 65.165,-3.595 67.881,-3.595 68.238,-3.238 75.477,-3.238 v1(76.874,-4.635)
  Inner Layer 7 w0.14: v1(76.874,-4.635) 77.383,-5.144 77.383,-6.667 77.38,-10.16 77.066,-10.474 77.066,-11.948 77.23,-12.111 77.23,-12.765 77.892,-13.427 77.892,-17.197 80.395,-19.7 80.395,-26.996 82.207,-28.808 82.207,-29.451 84.341,-31.584 86.729,-31.584 88.403,-33.259 88.403,-38.223 v1(88.803,-38.623)
  Inner Layer 8 w0.14: v1(36.24,-9.71) 36.639,-9.311 36.639,-8.586 37.326,-7.899 37.326,-5.997 36.894,-5.565 36.894,-4.255 37.28,-3.868 38.519,-3.868 38.912,-3.475 v1(38.912,-2.527)
  Secondary Side w0.135: R26.2@38.735,-1.524 38.912,-1.524 v1(38.912,-2.527) ; J1.160@88.405,-41.024 88.405,-39.022 v1(88.803,-38.623)
MCU_GPIO-92_L: J1.161 R25.1 U1.A4 | length 106.7
  Primary Side w0.135: v1(35.44,-8.91) U1.A4@35.84,-9.31 ; v1(88.803,-37.823) 89.203,-38.223 J1.161@89.203,-41.024
  Inner Layer 3 w0.14: v1(35.44,-8.91) 35.839,-9.309 35.839,-9.996 35.94,-10.097 40.335,-10.097 40.665,-10.428 40.665,-11.475 40.9,-11.71 43.718,-11.71 44.518,-10.91 61.302,-10.91 62.724,-9.488 67.197,-9.488 69.7,-11.991 75.699,-11.991 76.497,-11.194 v1(78.148,-11.194) ; v1(35.802,-2.782) 36.451,-2.782 36.513,-2.845 37.643,-2.845 38.379,-2.109 39.294,-2.109 v1(39.765,-2.579)
  Inner Layer 7 w0.14: v1(35.44,-8.91) 35.44,-7.278 35.984,-6.734 35.984,-3.675 35.802,-3.493 v1(35.802,-2.782)
  Inner Layer 8 w0.14: v1(39.765,-2.579) 39.765,-1.662 40.27,-1.157 40.27,5.523 39.922,5.871 v1(39.922,6.608) ; v1(78.148,-11.194) 78.423,-11.469 78.423,-12.992 78.183,-13.232 78.183,-17.122 81.332,-20.271 81.332,-27.475 82.564,-28.707 82.564,-28.867 84.951,-31.254 87.54,-31.254 89.203,-32.918 89.203,-37.423 v1(88.803,-37.823)
  Secondary Side w0.135: R25.1@38.354,6.604 38.903,7.153 39.369,7.153 39.918,6.604 v1(39.922,6.608)
MCU_GPIO-93_L: J1.162 U1.B4 | length 83.9
  Primary Side w0.14: v1(35.44,-9.71) U1.B4@35.84,-10.11
  Inner Layer 4 w0.14: v1(35.44,-9.71) 35.84,-10.11 37.24,-10.11 37.44,-10.31 37.44,-11.494 37.656,-11.71 45.251,-11.71 45.442,-11.519 45.442,-10.25 45.582,-10.11 48.821,-10.11 49.264,-10.553 68.757,-10.553 68.986,-10.782 71.26,-10.782 72.124,-9.918 74.41,-9.918 74.918,-10.426 v1(77.712,-10.426)
  Inner Layer 7 w0.14: v1(77.712,-10.426) 77.712,-11.061 77.602,-11.171 77.602,-12.734 78.183,-13.315 78.183,-17.084 81.483,-20.384 81.483,-27.626 82.589,-28.732 82.589,-28.867 84.977,-31.254 87.579,-31.254 89.203,-32.878 89.203,-37.423 v1(89.603,-37.823)
  Secondary Side w0.14: J1.162@89.205,-41.024 89.205,-38.222 v1(89.603,-37.823)
MCU_GPIO-94: J1.163 U1.A3 | length 100.3
  Primary Side w0.135: v1(34.64,-8.91) U1.A3@35.04,-9.31 ; v1(89.712,-38.595) 90.003,-38.886 J1.163@90.003,-41.024
  Inner Layer 4 w0.14: v1(34.621,-2.858) 34.634,-2.845 35.154,-2.325 35.323,-2.325 35.78,-1.868 41.289,-1.868 41.492,-1.665 42.813,-1.665 43.016,-1.868 45.962,-1.868 46.064,-1.969 47.588,-1.969 48.401,-1.157 50.229,-1.157 51.449,-2.376 58.381,-2.376 58.787,-1.969 59.715,-1.969 60.567,-1.118 61.226,-1.118 62.078,-1.969 65.977,-1.969 66.993,-2.985 67.525,-2.985 67.527,-2.984 73.953,-2.984 74.207,-2.73 v1(79.185,-2.73)
  Inner Layer 8 w0.14: v1(34.621,-2.858) 34.24,-3.239 34.24,-7.786 34.646,-8.192 34.646,-8.904 v1(34.64,-8.91) ; v1(79.185,-2.73) 79.185,-8.521 78.155,-9.552 78.155,-10.601 78.69,-11.136 78.69,-13.335 78.488,-13.537 78.488,-16.97 81.724,-20.206 81.724,-27.41 82.97,-28.656 82.97,-28.841 85.027,-30.899 88.238,-30.899 90.003,-32.664 90.003,-38.304 v1(89.712,-38.595)
MCU_GPIO-96: J9.18 U1.C3 | length 21.7
  Primary Side w0.135: v1(34.64,-10.51) U1.C3@35.04,-10.91
  Inner Layer 4 w0.14: v1(31.446,-9.716) 31.508,-9.716 31.902,-10.11 34.265,-10.11 v1(34.64,-10.51)
  Inner Layer 7 w0.14: v1(31.12,4.992) 31.12,2.671 30.885,2.436 30.885,1.53 32.081,0.334 32.081,-4.585 32.652,-5.156 32.652,-6.173 32.436,-6.389 31.979,-6.389 31.776,-6.592 31.776,-7.227 32.081,-7.532 32.081,-9.081 v1(31.446,-9.716)
  Secondary Side w0.135: J9.18@31.12,3.992 v1(31.12,4.992)
MCU_GPIO-97: J9.17 U1.A2 | length 16.1
  Primary Side w0.135: v1(33.84,-8.91) U1.A2@34.24,-9.31
  Inner Layer 4 w0.14: v1(30.81,-2.057) 30.911,-2.019 31.419,-2.019 31.723,-1.715 33.82,-1.715 34.036,-1.931 34.429,-1.931 v1(34.429,-1.906)
  Inner Layer 8 w0.14: v1(33.84,-8.91) 33.84,-8.433 33.084,-7.677 33.084,-6.986 33.402,-6.668 33.402,-6.046 33.94,-5.508 33.94,-2.739 34.429,-2.239 v1(34.429,-1.906)
  Secondary Side w0.135: v1(30.81,-2.057) 30.81,-1.808 31.374,-1.245 31.374,-0.533 31.12,-0.279 J9.17@31.12,1.352
MCU_GPIO-98: J9.4 U1.F1 | length 25
  Primary Side w0.135: v1(33.04,-12.91) U1.F1@33.44,-13.31
  Inner Layer 3 w0.14: v1(27.902,-5.779) 30.455,-5.779 31.458,-4.776 32.525,-4.776 v1(33.135,-5.385)
  Inner Layer 7 w0.14: v1(27.902,-5.779) 27.902,-5.13 27.192,-4.419 27.192,-2.704 27.788,-2.108 27.788,-1.257 27.609,-1.078 27.609,0.825 28.32,1.537 v1(28.32,2.992)
  Inner Layer 8 w0.14: v1(33.04,-12.91) 32.639,-12.509 32.639,-8.394 32.779,-8.254 32.779,-6.693 33.135,-6.338 v1(33.135,-5.385)
  Secondary Side w0.135: v1(28.32,2.992) J9.4@28.32,3.992
MCU_GPIO-99: J9.5 U1.G1 | length 22.1
  Primary Side w0.135: v1(33.04,-13.71) U1.G1@33.44,-14.11
  Inner Layer 3 w0.14: v1(28.753,-6.883) 29.795,-6.883 30.088,-7.176 31.522,-7.176 31.815,-6.883 v1(32.373,-6.883)
  Inner Layer 7 w0.14: v1(28.72,2.352) 28.72,0.075 28.359,-0.314 28.359,-3.53 28.753,-3.923 v1(28.753,-6.883)
  Inner Layer 8 w0.14: v1(32.373,-6.883) 32.373,-12.979 v1(33.04,-13.71)
  Secondary Side w0.135: J9.5@28.72,1.352 v1(28.72,2.352)
MCU_GPIO-100: J9.6 U1.H1 | length 27.1
  Primary Side w0.135: v1(33.04,-14.51) U1.H1@33.44,-14.91
  Inner Layer 3 w0.14: v1(27.228,-6.464) 28.345,-6.464 28.625,-6.184 v1(31.408,-6.184)
  Inner Layer 7 w0.14: v1(27.228,-6.464) 27.228,-5.218 26.861,-4.851 26.861,-2.322 27.228,-1.956 27.228,2.68 28.727,4.179 v1(28.727,4.877)
  Inner Layer 8 w0.14: v1(31.408,-6.184) 31.408,-7.481 31.839,-7.912 31.839,-13.509 32.84,-14.51 v1(33.04,-14.51)
  Secondary Side w0.135: J9.6@28.72,3.992 28.72,4.851 v1(28.727,4.877)
MCU_GPIO-101: J9.7 U1.H2 | length 20.3
  Primary Side w0.135: v1(33.84,-14.51) U1.H2@34.24,-14.91
  Inner Layer 8 w0.14: v1(31.382,-5.486) 31.738,-5.841 31.738,-5.912 31.896,-6.071 31.896,-7.157 32.101,-7.361 32.101,-13.371 32.839,-14.109 33.439,-14.109 v1(33.84,-14.51)
  Secondary Side w0.135: J9.7@29.12,1.352 29.12,-0.127 28.22,-1.027 28.22,-3.696 30.024,-5.5 31.368,-5.5 v1(31.382,-5.486)
MCU_GPIO-102: J9.8 U1.H3 | length 23.8
  Primary Side w0.135: v1(34.64,-14.51) U1.H3@35.04,-14.91
  Inner Layer 3 w0.14: v1(29.119,2.992) 29.72,2.391 30.52,2.391 31.159,1.752 32.121,1.752 v1(32.721,2.352)
  Inner Layer 7 w0.14: v1(32.721,2.352) 32.721,1.585 32.487,1.352 32.487,-3.544 34.24,-5.297 34.24,-14.11 v1(34.64,-14.51)
  Secondary Side w0.135: v1@29.12,2.992 J9.8@29.12,3.992
MCU_GPIO-103: J9.9 U1.J1 | length 20.1
  Primary Side w0.135: v1(33.04,-15.31) U1.J1@33.44,-15.71
  Inner Layer 7 w0.14: v1(29.133,-0.876) 29.337,-1.08 29.337,-2.692 29.478,-2.833 29.478,-6.783 30.671,-7.976 v1(30.671,-8.484)
  Inner Layer 8 w0.14: v1(30.671,-8.484) 30.163,-8.992 30.163,-10.135 30.569,-10.542 30.569,-11.405 30.785,-11.621 30.785,-14.237 31.858,-15.31 v1(33.04,-15.31)
  Secondary Side w0.135: v1(29.133,-0.876) 29.505,-0.364 29.52,-0.348 J9.9@29.52,1.352
MCU_GPIO-104: J9.11 U1.J2 | length 20.5
  Primary Side w0.135: v1(33.84,-15.31) U1.J2@34.24,-15.71
  Inner Layer 7 w0.14: v1(29.795,-1.969) 29.795,-6.338 31.445,-7.988 v1(31.445,-8.509)
  Inner Layer 8 w0.14: v1(31.445,-8.509) 31.445,-8.967 31.001,-9.411 31.001,-10.199 31.535,-10.733 31.535,-14.555 31.889,-14.91 33.528,-14.91 v1@33.884,-15.265
  Secondary Side w0.135: v1(29.795,-1.969) 29.795,-1.586 30.174,-1.207 30.174,-0.445 29.916,-0.187 29.92,-0.184 J9.11@29.92,1.352
MCU_GPIO-105: J9.12 U1.J3 | length 26
  Primary Side w0.135: v1(34.64,-15.31) U1.J3@35.04,-15.71
  Inner Layer 8 w0.14: v1(29.92,3.052) 30.561,3.693 31.539,3.693 31.928,3.304 31.928,2.845 32.309,2.464 32.309,1.523 32.64,1.192 34.54,1.192 35.12,0.612 35.12,-0.001 34.685,-0.436 34.685,-1.445 35.12,-1.88 35.12,-3.129 34.507,-3.742 34.507,-7.557 35.04,-8.09 35.04,-14.885 v1(34.64,-15.31)
  Secondary Side w0.135: v1(29.92,3.052) J9.12@29.92,3.992
MCU_GPIO-106: J9.13 U1.L2 | length 26.4
  Primary Side w0.135: v1(33.84,-17.71) U1.L2@34.24,-17.31
  Inner Layer 4 w0.14: v1(29.274,-17.374) 29.998,-17.374 30.061,-17.311 33.441,-17.311 v1(33.84,-17.71)
  Inner Layer 7 w0.14: v1(30.328,0.025) 30.328,-0.572 30.176,-0.724 30.176,-1.461 30.303,-1.588 30.303,-2.323 30.149,-2.477 30.149,-3.341 30.645,-3.836 30.645,-4.345 30.341,-4.649 30.341,-5.322 30.912,-5.893 v1(30.911,-6.591)
  Inner Layer 8 w0.14: v1(29.274,-17.374) 28.997,-17.097 28.997,-16.331 30.461,-14.866 30.461,-11.816 29.63,-10.985 29.63,-10.134 29.884,-9.88 29.884,-8.538 30.039,-8.383 30.039,-7.463 v1(30.911,-6.591)
  Secondary Side w0.135: J9.13@30.32,1.352 30.32,0.033 v1(30.328,0.025)
MCU_GPIO-107: J9.14 U1.L3 | length 26.6
  Primary Side w0.135: v1(34.64,-17.71) U1.L3@35.04,-17.31
  Inner Layer 3 w0.14: v1(32.169,-5.462) 32.589,-5.462 33.388,-6.262 v1(33.84,-6.262)
  Inner Layer 7 w0.14: v1(30.32,4.992) 30.32,1.485 31.598,0.207 31.598,-2.718 31.763,-2.884 31.763,-5.055 v1(32.169,-5.462)
  Inner Layer 8 w0.14: v1(33.84,-6.262) 33.84,-6.808 33.973,-6.941 33.973,-8.02 34.24,-8.287 34.24,-17.323 v1(34.64,-17.71)
  Secondary Side w0.135: J9.14@30.32,3.992 v1(30.32,4.992)
MCU_GPIO-108: J9.15 U1.L4 | length 26.5
  Primary Side w0.135: U1.L4@35.84,-17.31 v1(36.24,-17.71)
  Inner Layer 4 w0.14: v1(30.709,-1.016) 32.348,-1.016 32.475,-1.144 34.278,-1.144 34.773,-0.649 35.802,-0.649 35.904,-0.75 v1(36.209,-0.75)
  Inner Layer 7 w0.14: v1(36.209,-0.75) 36.652,-1.194 36.652,-4.174 36.399,-4.427 36.399,-6.871 35.84,-7.43 35.84,-17.233 v1(36.24,-17.71)
  Secondary Side w0.135: v1(30.709,-1.016) 30.811,-1.005 30.811,0.48 30.72,0.571 J9.15@30.72,1.352
MCU_GPIO-109: J9.16 U1.N2 | length 34.1
  Primary Side w0.135: v1(33.84,-19.31) U1.N2@34.24,-18.91
  Inner Layer 4 w0.14: v1(28.385,-19) 28.76,-19 29.071,-19.31 30.987,-19.31 31.866,-20.189 32.307,-20.189 32.79,-19.706 33.435,-19.706 33.831,-19.31 v1(33.84,-19.31)
  Inner Layer 8 w0.14: v1(28.385,-19) 28.385,-18.263 28.207,-18.085 28.207,-16.18 28.875,-15.512 28.875,-14.426 29.858,-13.444 29.858,-12.102 28.939,-11.184 28.939,-10.322 28.639,-10.022 28.239,-10.022 27.827,-9.609 27.827,-8.763 29.648,-6.942 29.648,-6.236 30.379,-5.505 30.729,-5.505 31.865,-4.369 31.865,1.004 30.72,2.135 v1(30.72,3.052)
  Secondary Side w0.135: v1@30.72,3.052 J9.16@30.72,3.992
MCU_GPIO-110: J9.50 U1.M2 | length 29.3
  Primary Side w0.135: v1(33.84,-18.51) U1.M2@34.24,-18.11
  Inner Layer 4 w0.14: v1(33.516,-7.316) v1(36.741,-7.316)
  Inner Layer 7 w0.14: v1(33.516,-7.316) 33.516,-8.256 33.44,-8.332 33.44,-18.11 v1(33.84,-18.51)
  Inner Layer 8 w0.14: v1(36.741,-7.316) 36.741,-6.097 36.538,-5.893 36.538,-4.114 36.658,-3.994 36.658,-2.026 37.515,-1.169 37.515,0.944 37.121,1.338 37.121,2.455 37.52,2.848 v1(37.52,4.992)
  Secondary Side w0.135: J9.50@37.52,3.992 v1(37.52,4.992)
MCU_GPIO-111: J9.2 U1.M4 | length 31.9
  Primary Side w0.135: v1(35.44,-18.51) U1.M4@35.84,-18.11 v1(35.44,-17.71)
  Inner Layer 8 w0.14: v1(27.915,4.902) 27.915,4.317 28.239,3.993 32.982,3.993 33.516,3.459 33.516,2.87 33.922,2.463 33.922,1.924 34.354,1.492 35.121,1.492 35.921,0.692 35.921,-0.255 35.712,-0.463 35.712,-0.915 35.89,-1.093 35.89,-1.753 35.407,-2.236 35.407,-3.253 35.84,-3.686 35.84,-17.31 v1(35.44,-17.71)
  Secondary Side w0.135: v1(27.915,4.902) 27.92,4.877 J9.2@27.92,3.992
MCU_GPIO-112: J9.3 U1.M3 | length 28.8
  Primary Side w0.135: v1(34.64,-18.51) U1.M3@35.04,-18.11
  Inner Layer 4 w0.14: v1(28.715,-17.857) 28.715,-17.844 30.81,-17.844 31.076,-18.11 34.24,-18.11 v1(34.64,-18.51)
  Inner Layer 7 w0.14: v1(28.32,0.352) 28.055,0.087 28.055,-3.632 28.436,-4.013 28.436,-6.033 28.119,-6.35 28.119,-7.405 28.74,-8.026 v1(29.49,-8.026)
  Inner Layer 8 w0.14: v1(28.715,-17.857) 28.715,-16.104 30.182,-14.638 30.182,-12.006 29.239,-11.064 29.239,-10.064 28.839,-9.664 28.839,-9.16 29.49,-8.509 v1(29.49,-8.026)
  Secondary Side w0.135: v1@28.32,0.352 J9.3@28.32,1.352
MCU_GPIO-113: J9.47 U1.N4 | length 23.6
  Primary Side w0.135: v1(35.44,-19.31) U1.N4@35.84,-18.91
  Inner Layer 7 w0.14: v1(35.44,-19.31) 35.04,-18.845 35.04,-7.059 35.577,-6.522 35.577,-3.675 35.166,-3.264 35.166,-2.439 34.963,-2.236 34.963,-1.728 34.685,-1.45 34.685,-0.953 35.43,-0.208 36.562,-0.208 v1(37.121,0.352)
  Secondary Side w0.135: J9.47@37.12,1.352 37.12,0.353 v1(37.121,0.352)
MCU_GPIO-114: J9.48 U1.N3 | length 39.5
  Primary Side w0.135: v1(34.64,-19.31) U1.N3@35.04,-18.91
  Inner Layer 3 w0.14: v1(29.02,-3.276) 29.692,-3.276 30.226,-2.743 30.226,-1.753 30.505,-1.474 31.648,-1.474 32.791,-2.617 33.96,-2.617 34.214,-2.363 35.319,-2.363 35.407,-2.274 v1(36.258,-2.274)
  Inner Layer 4 w0.14: v1(29.477,-18.441) 29.489,-18.429 32.36,-18.429 32.842,-18.911 34.241,-18.911 v1(34.64,-19.31)
  Inner Layer 7 w0.14: v1(29.02,-3.276) 29.02,-4.013 29.198,-4.191 29.198,-6.985 30.113,-7.899 30.113,-8.458 29.732,-8.839 29.249,-8.839 28.843,-9.245 28.843,-9.449 29.63,-10.236 29.63,-11.963 29.884,-12.217 29.884,-17.576 29.477,-17.983 v1(29.477,-18.441)
  Inner Layer 8 w0.14: v1(36.258,-2.274) 36.258,-1.449 36.906,-0.8 36.906,-0.318 36.729,-0.141 36.729,0.825 36.322,1.231 36.322,2.476 36.551,2.704 36.773,2.704 v1(37.121,3.052)
  Secondary Side w0.135: v1@37.12,3.052 J9.48@37.12,3.992